# Altium PCB PCB2.PcbDoc
Units mm, origin at the board's own origin, x right, y up, seen from the top; angles counter-clockwise.
Board outline 28 x 17 mm, 2 copper layers (Top Layer, Bottom Layer); 9 components, 5 nets, 20 pads, 2 vias.
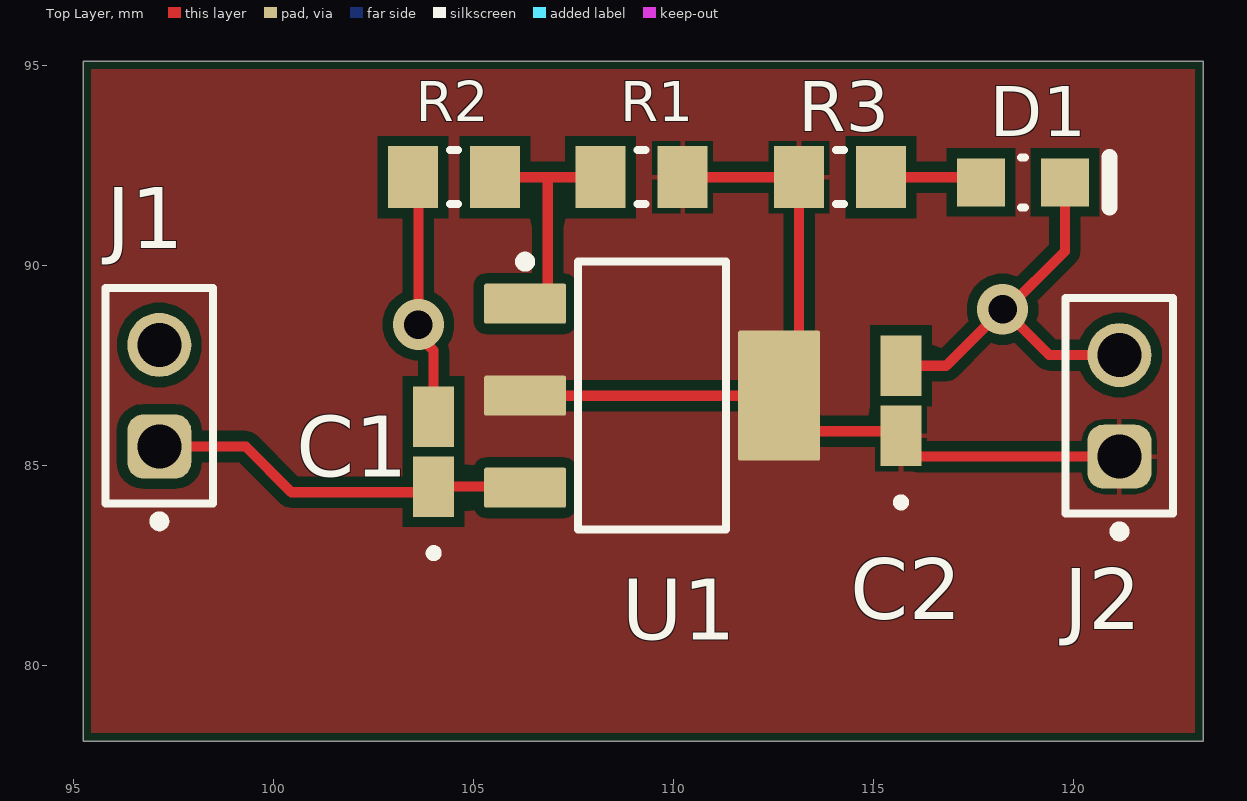
[diagram p0: Top Layer view]
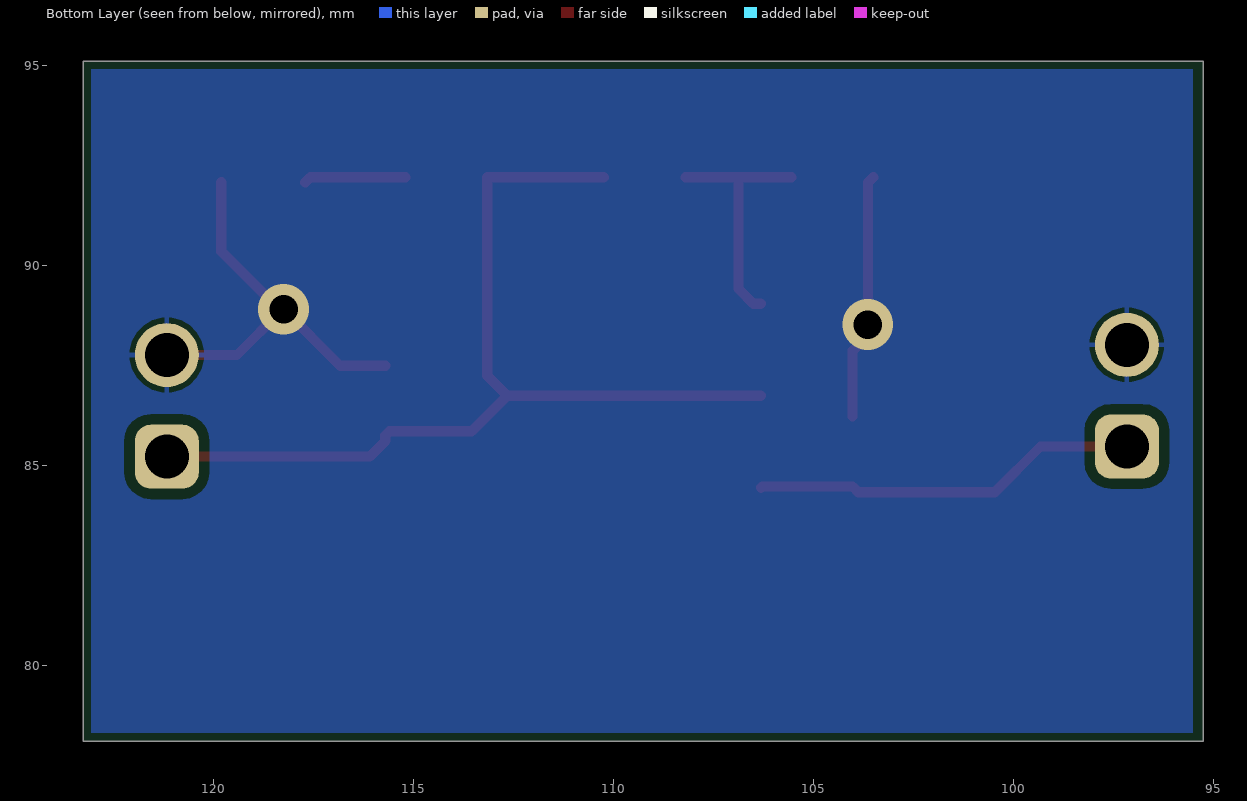
[diagram p1: Bottom Layer view, seen from below]

## Layer stack, top to bottom
Top Solder: solder mask 0.0102, Solder Resist, Dk 3.5
Top Layer: signal copper 0.0356
Dielectric 1: dielectric 0.32, FR-4, Dk 4.8
Bottom Layer: signal copper 0.0356
Bottom Solder: solder mask 0.0102, Solder Resist, Dk 3.5

## Board outline
95.25,78.105 95.25,95.105 123.25,95.105 123.25,78.105

## Design rules (kind name [scope] priority, off if disabled: settings)
AssemblyTestPointUsage AssemblyTestPointUsage_1 [All] p2:
AssemblyTestpoint AssemblyTestpoint_1 [All] p2: testpointundercomponent=TRUE minsize=1.016 maxsize=2.54 preferedsize=1.524 minholesize=0 maxholesize=1.016 preferedholesize=0.813 testpointgrid=0.025 usegrid=TRUE gridtolerance=0 allowsidetop=TRUE allowsidebottom=TRUE
BoardOutlineClearance [All] p1: gap=0.2 ignorepadtopadclearanceinfootprint=FALSE
Clearance [All] p1: gap=0.254 ignorepadtopadclearanceinfootprint=FALSE except(0.2: SMDPad-SMDPad)
Clearance Clearance_1 [All] p2: gap=0.127 ignorepadtopadclearanceinfootprint=FALSE except(0.25: Arc-Hole Track-Hole SMDPad-Hole THPad-Hole Via-Hole Fill-Hole Poly-Hole Region-Hole Text-Hole)
ComponentClearance ComponentClearance_1 [All] p2: gap=0.127 collisioncheckmode=3 verticalgap=0.127 showdistances=TRUE
DiffPairsRouting DiffPairsRouting_1 [All] p2: maxlimit=0.254 minlimit=0.127 mostfreqgap=0.127 toplayer_minwidth=0.127 toplayer_maxwidth=25.4 toplayer_prefwidth=0.127 bottomlayer_minwidth=0.127 bottomlayer_maxwidth=25.4 bottomlayer_prefwidth=0.127 maxuncoupledlength=12.7
FabricationTestPointUsage FabricationTestPointUsage_1 [All] p2: valid=0 allowmultiple=FALSE
FabricationTestpoint FabricationTestpoint_1 [All] p2: side=3 testpointundercomponent=TRUE minsize=1.016 maxsize=2.54 preferedsize=1.524 minholesize=0 maxholesize=1.016 preferedholesize=0.813 testpointgrid=0.025 allowsidetop=TRUE allowsidebottom=TRUE usegrid=TRUE gridtolerance=0
FanoutControl Fanout_BGA_1 [IsBGA] p1: bgadir=Out bgaviamode=Centered fanoutstyle=Auto fanoutdirection=Alternating viagrid=0.025 // Fanout_BGA (Default Rule)
FanoutControl Fanout_BGA [IsBGA] p2: bgadir=Out bgaviamode=Centered fanoutstyle=Auto fanoutdirection=Alternating viagrid=0.025 // Fanout_BGA (Default Rule)
FanoutControl Fanout_LCC [IsLCC] p3: bgadir=Out bgaviamode=Centered fanoutstyle=Auto fanoutdirection=Alternating viagrid=0.025 // Fanout_LCC (Default Rule)
FanoutControl Fanout_LCC_1 [IsLCC] p4: bgadir=Out bgaviamode=Centered fanoutstyle=Auto fanoutdirection=Alternating viagrid=0.025 // Fanout_LCC (Default Rule)
FanoutControl Fanout_SOIC_1 [IsSOIC] p5: bgadir=Out bgaviamode=Centered fanoutstyle=Auto fanoutdirection=Alternating viagrid=0.025 // Fanout_SOIC (Default Rule)
FanoutControl Fanout_SOIC [IsSOIC] p6: bgadir=Out bgaviamode=Centered fanoutstyle=Auto fanoutdirection=Alternating viagrid=0.025 // Fanout_SOIC (Default Rule)
FanoutControl Fanout_Small_1 [(CompPinCount < 5)] p7: bgadir=Out bgaviamode=Centered fanoutstyle=Auto fanoutdirection=OutThenIn viagrid=0.025 // Fanout_Small (Default Rule)
FanoutControl Fanout_Small [(CompPinCount < 5)] p8: bgadir=Out bgaviamode=Centered fanoutstyle=Auto fanoutdirection=OutThenIn viagrid=0.025 // Fanout_Small (Default Rule)
FanoutControl Fanout_Default [All] p9: bgadir=Out bgaviamode=Centered fanoutstyle=Auto fanoutdirection=Alternating viagrid=0.025 // Fanout_Default (Default Rule)
FanoutControl Fanout_Default_1 [All] p10: bgadir=Out bgaviamode=Centered fanoutstyle=Auto fanoutdirection=Alternating viagrid=0.025 // Fanout_Default (Default Rule)
Height Height_1 [All] p2: minheight=0 maxheight=1816.048 prefheight=12.7
HoleSize HoleSize_1 [All] p2: absolutevalues=TRUE maxlimit=6.3 minlimit=0.3 maxpercent=80.000 minpercent=20.000
HoleToHoleClearance HoleToHoleClearance_1 [All] p2: gap=0.25 allowstackedmicrovias=FALSE
LayerPairs LayerPairs_1 [All] p2: enforce=TRUE
MinimumAnnularRing [All] p1: minimumring=0.076
MinimumSolderMaskSliver MinimumSolderMaskSliver_1 [All] p2: minsoldermaskwidth=0
NetAntennae NetAntennae_1 [All] p2: netantennaetolerance=0
PasteMaskExpansion PasteMaskExpansion_1 [All] p2: expansion=0
PlaneClearance PlaneClearance_1 [All] p2: clearance=0.127
PlaneConnect PlaneConnectPowerPads [InPadClass('PowerPads')] p2: planeconnectstyle=Direct reliefexpansion=0.508 reliefentries=4 reliefconductorwidth=0.254 reliefairgap=0.254
PlaneConnect PlaneConnect_1 [All] p3: pad.planeconnectstyle=Relief pad.reliefexpansion=0.3 pad.reliefentries=4 pad.reliefconductorwidth=0.127 pad.reliefairgap=0.127 via.planeconnectstyle=Direct via.reliefexpansion=0.3 via.reliefentries=4 via.reliefconductorwidth=0.127 via.reliefairgap=0.127
PolygonConnect [InComponent('U1')] p1: connectstyle=Direct reliefconductorwidth=0.254 reliefentries=4 polygonreliefangle="90 Angle" airgapwidth=0.254
PolygonConnect PolygonConnectPowerPads [All vs (InPadClass('PowerPads'))] p2: connectstyle=Direct reliefconductorwidth=0.254 reliefentries=4 polygonreliefangle="90 Angle" airgapwidth=0.254
PolygonConnect PolygonConnect_1 [All] p3: thpad.connectstyle=Relief thpad.reliefconductorwidth=0.127 thpad.reliefentries=4 thpad.polygonreliefangle="90 Angle" thpad.airgapwidth=0.127 smdpad.connectstyle=Relief smdpad.reliefconductorwidth=0.127 smdpad.reliefentries=4 smdpad.polygonreliefangle="90 Angle" smdpad.airgapwidth=0.127 via.connectstyle=Direct via.reliefconductorwidth=0.127 via.reliefentries=4 via.polygonreliefangle="90 Angle" via.airgapwidth=0.127
RoutingCorners RoutingCorners_1 [All] p2: cornerstyle=45-Degree minsetback=2.54 maxsetback=2.54
RoutingLayers RoutingLayers_1 [All] p2: top layer_v5=TRUE bottom layer_v5=TRUE
RoutingPriority RoutingPriority_1 [All] p2: routingpriority=0
RoutingTopology RoutingTopology_1 [All] p2: topology=Shortest
RoutingVias [All] p1: holewidth=0.711 width=1.27 viastyle="Through Hole" minholewidth=0.711 minwidth=1.27 maxholewidth=0.711 maxwidth=1.27
RoutingVias RoutingVias_1 [All] p2: holewidth=0.3 width=0.6 viastyle="Through Hole" minholewidth=0.3 minwidth=0.6 maxholewidth=0.6 maxwidth=6.6
ShortCircuit ShortCircuit_1 [All] p2: allowed=FALSE
SilkToSilkClearance SilkToSilkClearance_1 [All] p2: silktosilkclearance=0
SilkToSolderMaskClearance [IsPad] p1: minsilkscreentomaskgap=0.15 clearancetoexposedcopper=TRUE
SolderMaskExpansion SolderMaskExpansion_2 [InComponent('C1') Or InComponent('C2')] p1: expansion=0.2 istentingtop=FALSE
SolderMaskExpansion [All] p2: expansion=0 istentingtop=FALSE
SolderMaskExpansion SolderMaskExpansion_1 [All] p3: expansion=0.02 istentingtop=FALSE
SupplyNets "Schematic Supply Nets_2" [InNet('3V3')] p1: voltage=0.000
SupplyNets "Schematic Supply Nets_1" [InNet('GND')] p2: voltage=0.000
SupplyNets "Schematic Supply Nets" [InNet('5V')] p3: voltage=0.000
UnRoutedNet UnRoutedNet_1 [All] p2:
UnpouredPolygon UnpouredPolygon_1 [All] p2:
Width [All] p1: maxlimit=0.254 minlimit=0.254 preferedwidth=0.254
Width Width_1 [All] p2: maxlimit=25.4 minlimit=0.127 preferedwidth=0.127 minimp=50.000000 maximp=50.000000 favimp=50.000000
24 further rules are at their usual default settings.

## Components (designator, comment, footprint, x,y, rotation, side; value= is the part's Value field where it differs from the comment)
C1 "10µF" CAPPM2012X120 104.013,85.344 r90 top value=10uF
C2 "10µF" CAPPM2012X120 115.697,86.614 r90 top value=10uF
D1 "LTST-C170KRKT" LTST-C170KRKT_V 118.745,92.075 r0 top
J1 "61300211121" 61300211121 97.155,86.741 r90 top
J2 "61300211121" 61300211121 121.158,86.487 r90 top
R1 "RK73H2ATTD2000F" RESC2013X60X30ML20T20 109.211,92.202 r0 top value=200Ω
R2 "RK73H2ATTD3240F" RESC2013X60X30ML20T20 104.521,92.202 r0 top value=324Ω
R3 "RK73H2ATTD4320F" RESC2013X60X30ML20T20 114.173,92.202 r180 top value=432Ω
U1 "LM1117MP-ADJ/NOPB" DCY0004A_M 109.474,86.741 r0 top

## Footprints (in the part's own frame and the unit in brackets; to place one, negate y for a bottom-side part, rotate by r counter-clockwise, add the part's x,y. Pads: shape width x height; smd on the part's side, far side on the other; paste and mask are expansions set on the pad)
61300211121 [mm] "Pin Header, pitch 2.54 mm, THT, Vertical, single row, 2p"
  rrect50% 1.6x1.6 hole 1.1: 1(-1.27,0)
  round 1.6 hole 1.1: 2(1.27,0)
  silkscreen extent -3.26,-1.35 2.69,1.35, body extent -2.54,-1.27 2.54,1.27, height 8.57
CAPPM2012X120 [mm]
  rect 1.51x1.03 smd: N(0.875,0) P(-0.875,0)
  silkscreen extent -2.64,-0.1 -2.44,0.1
DCY0004A_M [mm] "SOT223, 4-Leads, Body 6.7x3.7mm, Pitch 2.3mm, IPC Low Density"
  rrect10% 2.05x1 smd: 1(-3.175,2.3) 2(-3.175,0) 3(-3.175,-2.3)
  rrect5% 2.05x3.25 smd: 4(3.175,0)
  silkscreen extent -3.3,-3.35 1.85,3.47, body extent -3.5,-3.25 3.5,3.25, height 1.62
LTST-C170KRKT_V [mm] "SMD, 2-Leads, Body 2x1.25mm"
  rect 1.2x1.2 smd: 1(-1.05,0) 2(1.05,0)
  silkscreen extent -0.05,-0.64 2.16,0.64, body extent -1,-0.63 1,0.63, height 1.2
RESC2013X60X30ML20T20 [mm] "Chip Resistor, 2-Leads, Body 2.00x1.25mm, IPC Low Density"
  rect 1.25x1.55 smd: 1(-1.025,0) 2(1.025,0)
  silkscreen extent -0.1,-0.67 0.1,0.67, body extent -1.1,-0.72 1.1,0.72, height 0.6

## Part data
C1 C2: library part F921A106MPA, "<a href=\"https://pricing.snapeda.com/parts/F921A475MPA/AVX/view-part?ref=eda\">Check availability</a> <a href=\"https://pricing.snapeda.com/parts/F921A475MPA/AVX/view-part?ref=eda\">Check availability</a> <a href=\"https://pricing.snapeda.com/parts/F921A475MPA/AVX/view-part?ref=eda\">Check availability</a>", Manufacturer="Kyocera AVX", Package=None, Supplier Part Number=478-11412-1-ND, Tolerance=20%, Voltage Rating=10V, ESR=6R, Manufacturer Part Number=F921A106MPA
D1: library part CMP-00026-00003-1, "Lite-On RedLED, CHIP LED 0805series, 2012 (0805)encapsulation, wavelength631 nm, 2 x 1.25mm", Case/Package=0805, Color=Red, Forward Voltage=2.4V, Manufacturer="Lite-On Inc."
J1 J2: library part CMP-002-00071-1, "WR-PHD Straight Male, PCB Header, Through Hole, 1 Rows, 2 Contacts, 2.54mm Pitch", Current Rating=3A, Mounting Technology="Through Hole", Number of Positions=2, Pitch=2.54mm
R1: library part CMP-009-00178-1, "Res Thick Film 0805 200 Ohm 1% 0.25W(1/4W) ±100ppm/C Pad SMD Automotive T/R", Case/Package=0805, Power Rating=250mW, Tolerance=1%
R2: library part CMP-009-00177-1, "Res Thick Film 0805 324 Ohm 1% 0.25W(1/4W) ±100ppm/C Pad SMD Automotive T/R", Case/Package=0805, Power Rating=250mW, Tolerance=1%
R3: library part CMP-009-00179-1, "Res Thick Film 0805 432 Ohm 1% 0.25W(1/4W) ±100ppm/C Pad SMD T/R Automotive AEC-Q200", Case/Package=0805, Power Rating=250mW, Tolerance=1%
U1: library part CMP-019-00051-1, "LDO Regulator Pos 1.25V to 13.8V 0.8A 4-Pin(3+Tab) SOT-223 T/R", Case/Package=SOT-223, Dropout Voltage=1.2V, Max Supply Voltage=15V, Output Current=800mA, Output Voltage=13.8V

## Via types
v1: diameter 1.27, hole 0.711, Top Layer to Bottom Layer, 2 vias

## Nets (pads, with @x,y where several pads share a name; then routed paths per layer and width w, separated by ;. In a path a pad name is that pad's centre, name@x,y a point inside that pad or via, vN(x,y) a via of type N, cw(c..) or ccw(c..) an arc to the next point about the centre after c; other vN are vias at no path point)
3V3: C2.P J2.1 R1.2 R3.2 U1.2 U1.4 | length 24.1
  Top Layer w0.254: U1.2 U1.4 ; R1.2 R3.2 113.148,87.24 U1.4 ; J2.1 116.085,85.217 115.697,85.605 C2.P 115.584,85.852 113.538,85.852 U1.4
5V: C1.P J1.1 U1.3 | length 9.7
  Top Layer w0.254: J1.1 99.314,85.471 100.457,84.328 103.872,84.328 C1.P 106.271,84.469 U1.3
GND: C1.N C2.N D1.2 J1.2 J2.2 R2.1 | length 16.6
  Top Layer w0.254: R2.1 103.632,92.066 v1(103.632,88.519) 103.632,88.244 104.013,87.863 C1.N ; C2.N 116.826,87.489 v1(118.237,88.9) ; D1.2 119.795,90.352 118.343,88.9 118.259,88.9 119.402,87.757 J2.2
NetD1_1: D1.1 R3.1 | length 2.5
  Top Layer w0.254: R3.1 117.568,92.202 D1.1
NetR1_1: R1.1 R2.2 U1.1 | length 6.1
  Top Layer w0.254: R2.2 106.866,92.202 ; U1.1 106.493,89.041 106.866,89.414 106.866,92.202 ; R1.1 106.866,92.202

## Polygon pours and split planes (outlines as drawn)
GND on Bottom Layer "GND_L02_P002" (solid, pour order 2): 95.504,95.25 95.504,78.232 123.444,78.232 123.571,78.359 123.571,95.123 95.377,95.123
3V3 on Top Layer "3V3_L01_P000" (solid, pour order 0): 95.25,95.123 95.25,78.105 123.19,78.105 123.317,78.232 123.317,94.996 95.123,94.996

## Silkscreen, mask and mechanical layers (free items; w line width, h text height)
Mechanical 1:
  the board outline again, w0.254